# Altium PCB Buttons board.PcbDoc
Units mm, origin at the board's own origin, x right, y up, seen from the top; angles counter-clockwise.
Board outline 39 x 28 mm, 2 copper layers (Top Layer, Bottom Layer); 6 components, 5 nets, 29 pads, 50 vias.
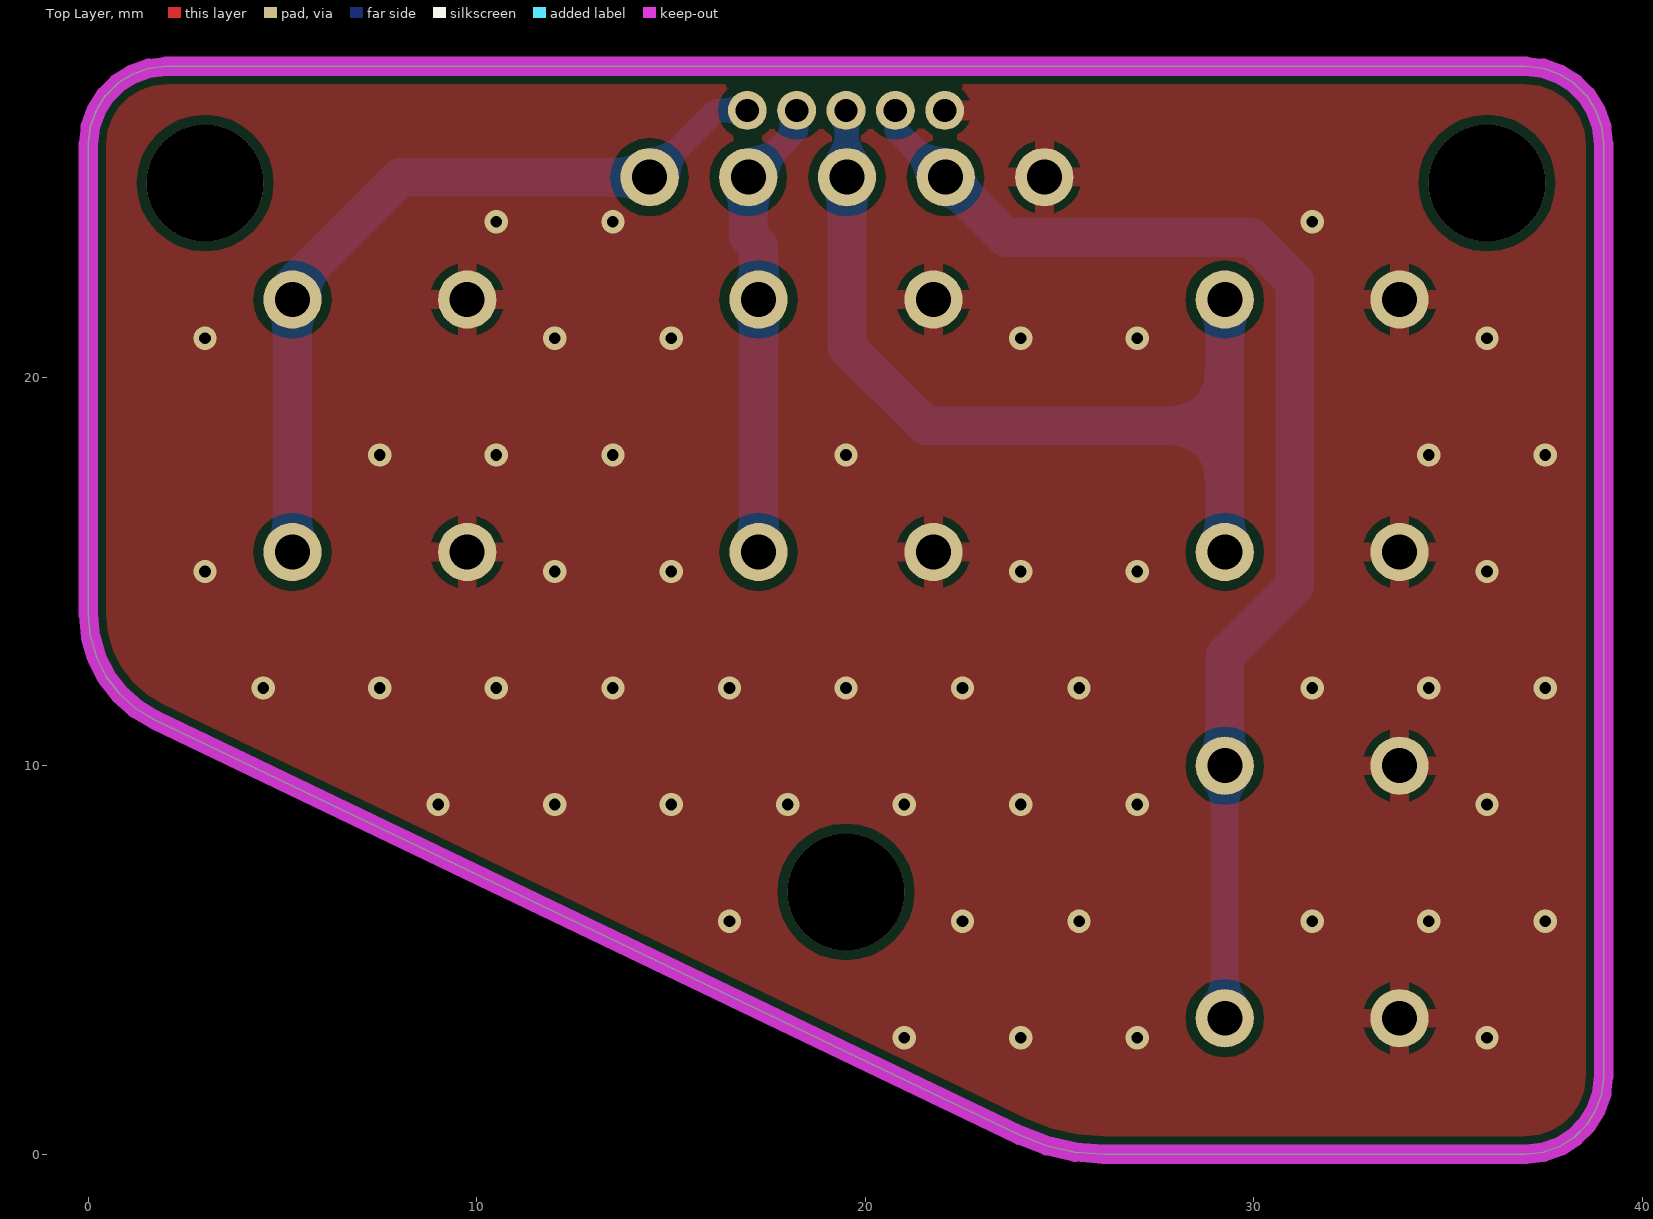
[diagram p0: Top Layer view]
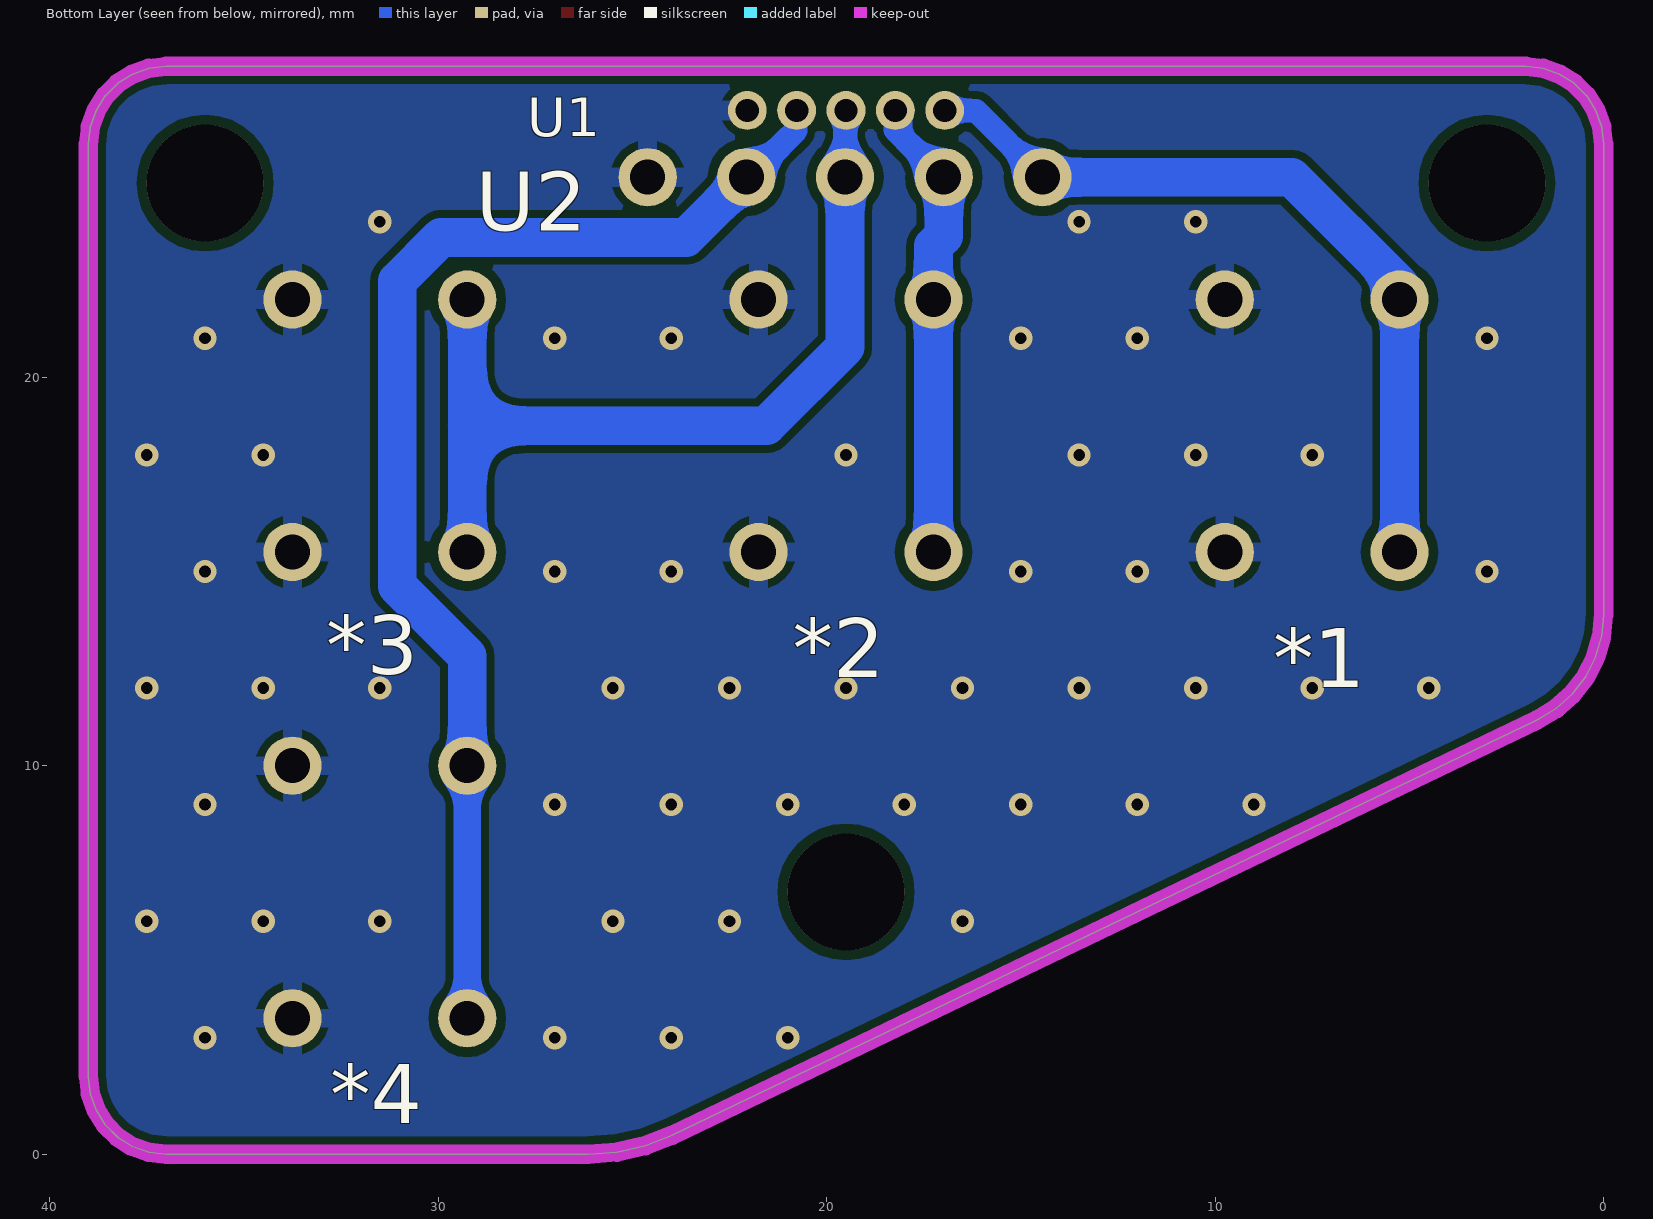
[diagram p1: Bottom Layer view, seen from below]

## Layer stack, top to bottom
Top Solder: solder mask 0.0102, Solder Resist, Dk 3.5
Top Layer: signal copper 0.0356
Dielectric 1: dielectric 0.32, FR-4, Dk 4.8
Bottom Layer: signal copper 0.0356
Bottom Solder: solder mask 0.0102, Solder Resist, Dk 3.5

## Board outline
0,13.888 0.052,13.329 0.208,12.79 0.461,12.29 0.803,11.845 1.221,11.472 1.702,11.183 23.974,0.492 24.668,0.221 25.395,0.056 26.138,0 37,0 37.445,0.05 37.868,0.198 38.247,0.436 38.564,0.753 38.802,1.132 38.95,1.555 39,2 39,26 38.95,26.445 38.802,26.868 38.564,27.247 38.247,27.564 37.868,27.802 37.445,27.95 37,28 2,28 1.555,27.95 1.132,27.802 0.753,27.564 0.436,27.247 0.198,26.868 0.05,26.445 0,26

## Design rules (kind name [scope] priority, off if disabled: settings)
BoardOutlineClearance [All] p1: gap=0.3 ignorepadtopadclearanceinfootprint=FALSE
Clearance Clearance_MultiLayerPad [OnLayer('Multi-Layer') and IsPad] p1: gap=0.25 ignorepadtopadclearanceinfootprint=FALSE except(0: Arc-Hole Track-Hole SMDPad-Hole THPad-Hole Via-Hole Fill-Hole Poly-Hole Region-Hole Text-Hole)
Clearance Clearance_Polygon [InPolygon] p2: gap=0.2 ignorepadtopadclearanceinfootprint=FALSE except(0: Arc-Hole Track-Hole SMDPad-Hole THPad-Hole Via-Hole Fill-Hole Poly-Hole Region-Hole Text-Hole)
Clearance [All] p3: gap=0.15 ignorepadtopadclearanceinfootprint=FALSE except(0: Arc-Hole Track-Hole SMDPad-Hole THPad-Hole Via-Hole Fill-Hole Poly-Hole Region-Hole Text-Hole)
HoleToHoleClearance [All] p1: gap=0.2 allowstackedmicrovias=TRUE
MinimumSolderMaskSliver [All] p1: minsoldermaskwidth=0.2
PlaneClearance [All] p1: clearance=0.5
PlaneConnect [All] p1: planeconnectstyle=Relief reliefexpansion=0.5 reliefentries=4 reliefconductorwidth=0.3 reliefairgap=0.2
PolygonConnect PolygonConnect_PadGND [InNet('GND') and IsPad] p1: connectstyle=Relief reliefconductorwidth=0.5 reliefentries=4 polygonreliefangle="90 Angle" airgapwidth=0.2
PolygonConnect PolygonConnect_Via [IsVia] p2: connectstyle=Direct reliefconductorwidth=0.254 reliefentries=4 polygonreliefangle="90 Angle" airgapwidth=0.254
PolygonConnect [All] p3: connectstyle=Relief reliefconductorwidth=0.3 reliefentries=4 polygonreliefangle="90 Angle" airgapwidth=0.2
RoutingVias [All] p1: holewidth=0.3 width=0.7 viastyle="Through Hole" minholewidth=0.3 minwidth=0.7 maxholewidth=0.3 maxwidth=0.7
SilkToSolderMaskClearance [IsPad] p1: minsilkscreentomaskgap=0.2 clearancetoexposedcopper=TRUE
SolderMaskExpansion [All] p1: expansion=0.075
Width [All] p1: maxlimit=10 minlimit=0.15 preferedwidth=0.15
25 further rules are at their usual default settings.

## Components (designator, comment, footprint, x,y, rotation, side; value= is the part's Value field where it differs from the comment)
*1 "Switch" Switch 7.5,18.75 r90 bottom
*2 "Switch" Switch 19.5,18.75 r90 bottom
*3 "Switch" Switch 31.5,18.75 r90 bottom
*4 "Switch" Switch 31.5,6.75 r90 bottom
U1 "Header 5" 5x1.27 19.5,26.868 r0 bottom
U2 "Header 5" 5x2.54 19.525,25.15 r0 bottom

## Footprints (in the part's own frame and the unit in brackets; to place one, negate y for a bottom-side part, rotate by r counter-clockwise, add the part's x,y. Pads: shape width x height; smd on the part's side, far side on the other; paste and mask are expansions set on the pad)
5x1.27 [mm]
  round 1 hole 0.6: 1(-2.54,0) 2(-1.27,0) 3(0,0) 4(1.27,0) 5(2.54,0)
5x2.54 [mm]
  round 1.5 hole 0.9: 1(-5.08,0) 2(-2.54,0) 3(0,0) 4(2.54,0) 5(5.08,0)
Switch [mm]
  round 1.5 hole 0.9: 1(-3.25,2.25) 1(3.25,2.25) 2(-3.25,-2.25) 2(3.25,-2.25)

## Free pads (board coordinates)
  round 3 hole 3: 1(3,25) 1(19.5,6.75) 1(36,25)

## Via types
v1: diameter 0.6, hole 0.3, Top Layer to Bottom Layer, tented both sides, 50 vias

## Nets (pads, with @x,y where several pads share a name; then routed paths per layer and width w, separated by ;. In a path a pad name is that pad's centre, name@x,y a point inside that pad or via, vN(x,y) a via of type N, cw(c..) or ccw(c..) an arc to the next point about the centre after c; other vN are vias at no path point)
GND: *1.1 *2.1 *3.1 *4.1 U1.5 U2.5
  other v1: 21,3 24,3 27,3 36,3 16.5,6 22.5,6 25.5,6 31.5,6 34.5,6 37.5,6 9,9 12,9 15,9 18,9 21,9 24,9 27,9 36,9 4.5,12 7.5,12 10.5,12 13.5,12 16.5,12 19.5,12 22.5,12 25.5,12 31.5,12 34.5,12 37.5,12 3,15 12,15 15,15 24,15 27,15 36,15 7.5,18 10.5,18 13.5,18 19.5,18 34.5,18 37.5,18 3,21 12,21 15,21 24,21 27,21 36,21 10.5,24 13.5,24 31.5,24
Switch1: *1.2 U1.1 U2.1 | length 20.5
  Top Layer w1: *1.2@5.245,22.005 *1.2@5.25,22
  Bottom Layer w0.6: U2.1 16.163,26.868 U1.1
  Bottom Layer w1: *1.2@5.25,15.5 5.25,22 5.25,22.375 8.025,25.15 U2.1
Switch2: *2.2 U1.2 U2.2 | length 12
  Bottom Layer w0.6: U2.2@17.01,25.15 18.23,26.37 U1.2
  Bottom Layer w1: U2.2@17.01,25.15 U2.2 16.985,23.64 17.25,23.375 17.25,22 *2.2@17.25,15.5
Switch3: *3.2 U1.3 U2.3 | length 23.1
  Bottom Layer w0.6: U2.3@19.52,25.155 U1.3@19.52,26.848
  Bottom Layer w1: U2.3@19.52,25.155 U2.3 19.525,20.775 21.55,18.75 29.25,18.75 ; *3.2@29.25,15.5 29.25,18.75 ; *3.2@29.25,22 29.25,18.75
Switch4: *4.2 U1.4 U2.4 | length 32.1
  Bottom Layer w0.6: U1.4@20.79,26.868 20.79,26.35 U2.4@21.99,25.15
  Bottom Layer w0.7: *4.2@29.25,3.5 *4.2@29.25,10
  Bottom Layer w1: U2.4@21.99,25.15 U2.4 23.615,23.6 29.925,23.6 31.05,22.475 31.05,14.625 29.25,12.825 *4.2@29.25,10

## Polygon pours and split planes (outlines as drawn)
GND on Top Layer "top gmd" (solid, pour order 2): 0,13.888 0.052,13.329 0.208,12.79 0.461,12.29 0.803,11.845 1.221,11.472 1.702,11.183 23.974,0.492 24.668,0.221 25.395,0.056 26.138,0 37,0 37.445,0.05 37.868,0.198 38.247,0.436 38.564,0.753 38.802,1.132 38.95,1.555 39,2 39,26 38.95,26.445 38.802,26.868 38.564,27.247 38.247,27.564 37.868,27.802 37.445,27.95 37,28 2,28 1.555,27.95 1.132,27.802 0.753,27.564 0.436,27.247 0.198,26.868 0.05,26.445 0,26
GND on Bottom Layer "GND" (solid, pour order 0): 0,13.888 0.052,13.329 0.208,12.79 0.461,12.29 0.803,11.845 1.221,11.472 1.702,11.183 23.974,0.492 24.668,0.221 25.395,0.056 26.138,0 37,0 37.445,0.05 37.868,0.198 38.247,0.436 38.564,0.753 38.802,1.132 38.95,1.555 39,2 39,26 38.95,26.445 38.802,26.868 38.564,27.247 38.247,27.564 37.868,27.802 37.445,27.95 37,28 2,28 1.555,27.95 1.132,27.802 0.753,27.564 0.436,27.247 0.198,26.868 0.05,26.445 0,26

## Keep-outs
Keep-Out Layer:
  the board outline again, w0.5